# Altium PCB NSRUL.PcbDoc
Units mm, origin at the board's own origin, x right, y up, seen from the top; angles counter-clockwise.
Board outline 100 x 100 mm, 2 copper layers (Top Layer, Bottom Layer); 2 components, 0 nets, 0 pads, 36 vias.
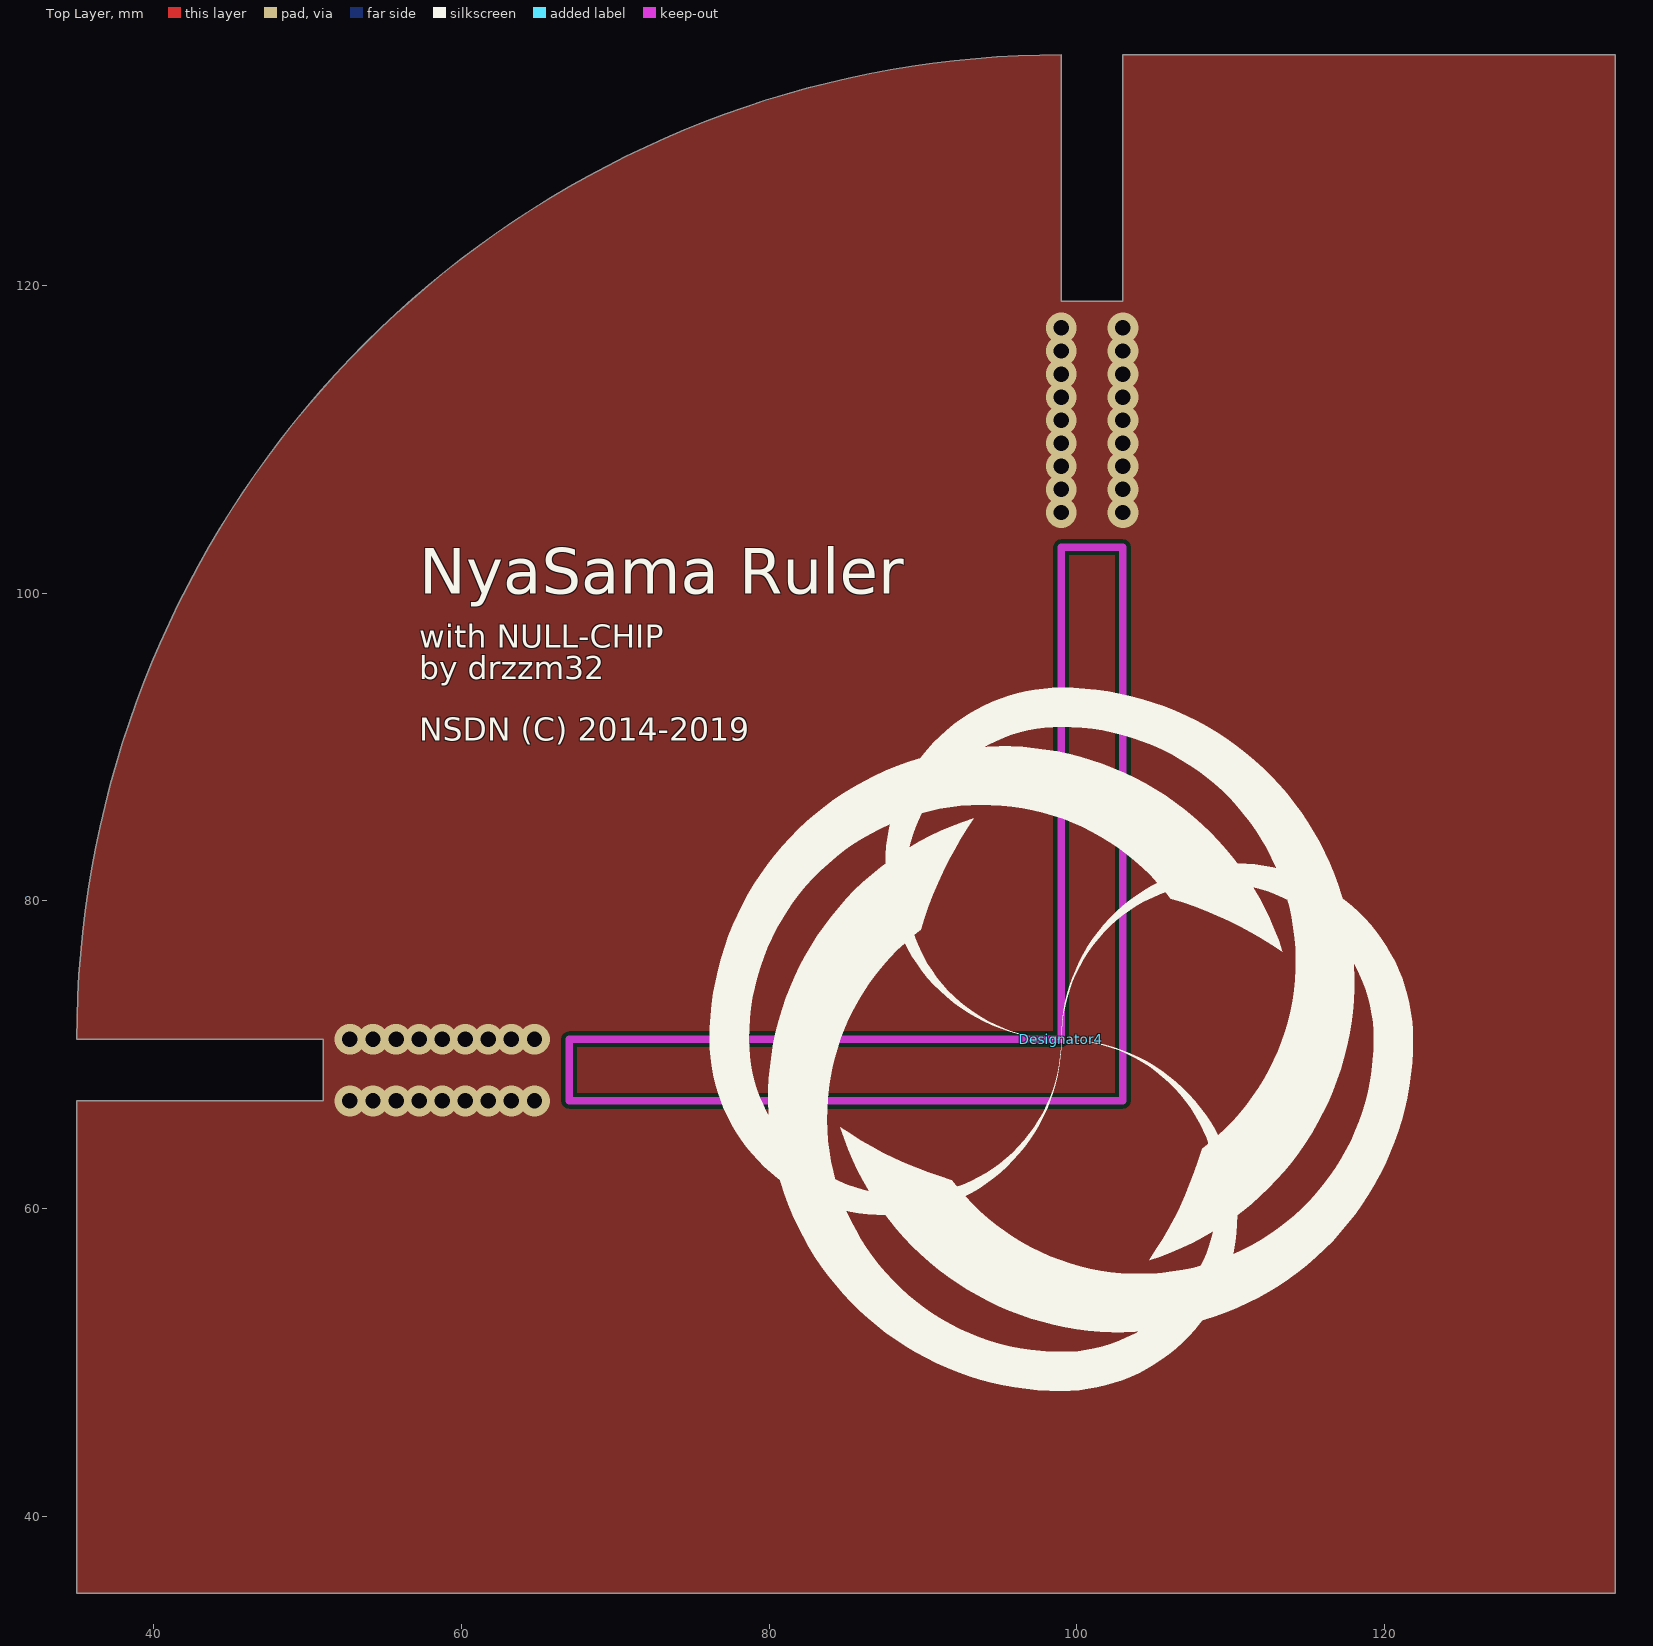
[diagram p0: Top Layer view]
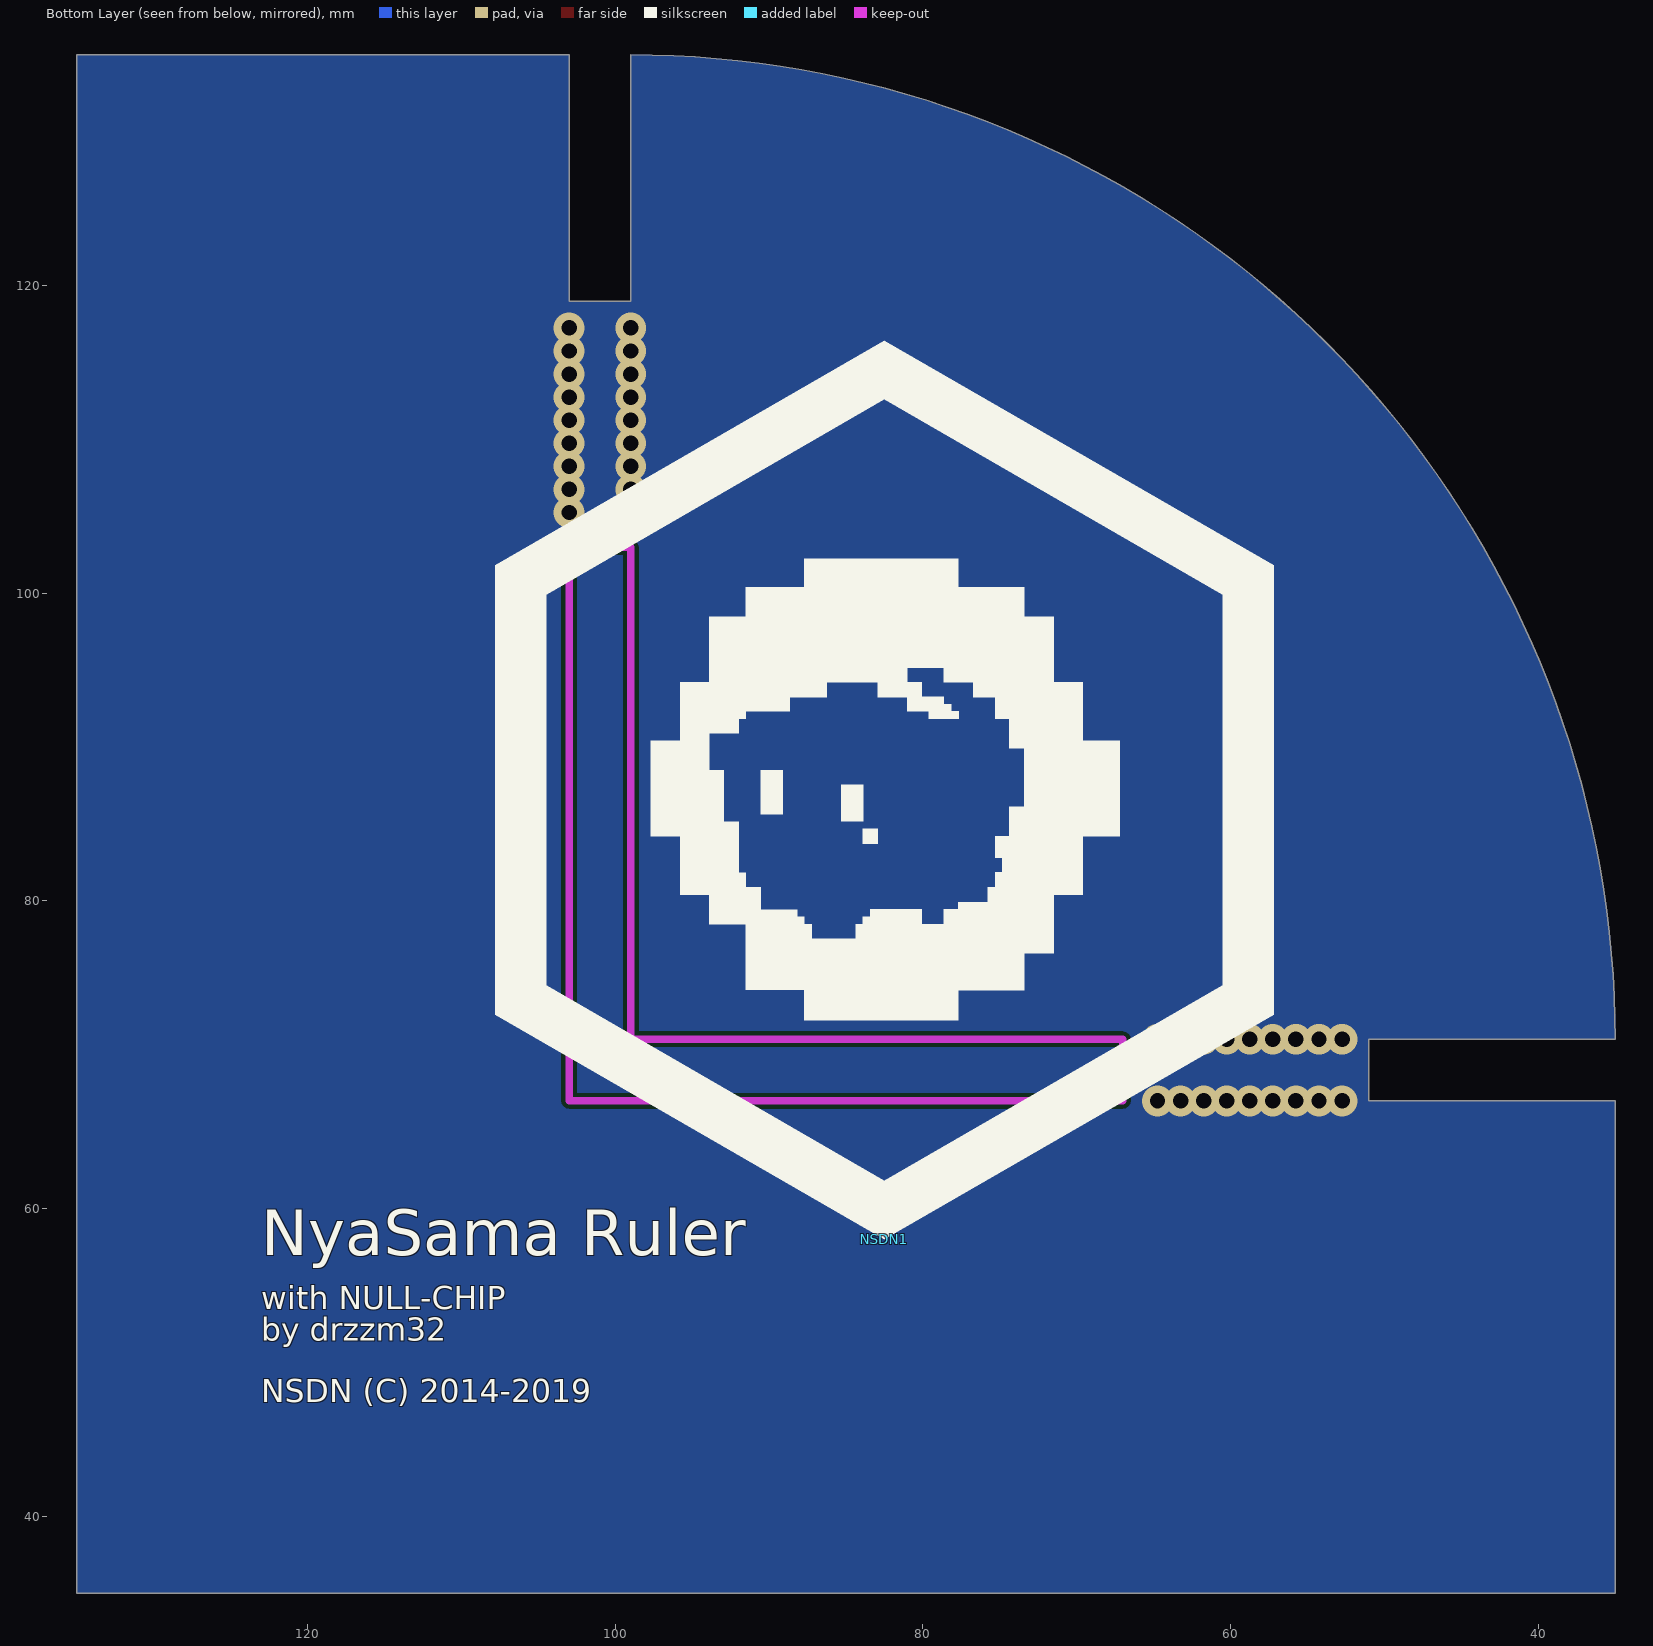
[diagram p1: Bottom Layer view, seen from below]

## Layer stack, top to bottom
Top Solder: solder mask 0.0102, Solder Resist, Dk 3.5
Top Layer: signal copper 0.0356
Dielectric 1: dielectric 0.32, FR-4, Dk 4.8
Bottom Layer: signal copper 0.0356
Bottom Solder: solder mask 0.0102, Solder Resist, Dk 3.5

## Board outline
35,67 51,67 51,71 35,71 cw(c99,71) 99,135 99,119 103,119 103,135 135,135 135,35 35,35

## Design rules (kind name [scope] priority, off if disabled: settings)
Clearance [All] p1: gap=0.254 ignorepadtopadclearanceinfootprint=FALSE except(0: Arc-Hole Track-Hole SMDPad-Hole THPad-Hole Via-Hole Fill-Hole Poly-Hole Region-Hole Text-Hole)
PolygonConnect [All] p1: connectstyle=Relief reliefconductorwidth=0.254 reliefentries=4 polygonreliefangle="90 Angle" airgapwidth=0.254
RoutingVias [All] p1: holewidth=0.711 width=1.27 viastyle="Through Hole" minholewidth=0.711 minwidth=1.27 maxholewidth=0.711 maxwidth=1.27
SolderMaskExpansion [All] p1: expansion=0.102
Width [All] p1: maxlimit=0.254 minlimit=0.254 preferedwidth=0.254
30 further rules are at their usual default settings.

## Components (designator, comment, footprint, x,y, rotation, side; value= is the part's Value field where it differs from the comment)
Designator4 "Comment" NST_4_CORE_45mm 99,71 r0 top
NSDN1 "Comment" NSDN 82.5,58 r180 bottom

## Footprints (in the part's own frame and the unit in brackets; to place one, negate y for a bottom-side part, rotate by r counter-clockwise, add the part's x,y. Pads: shape width x height; smd on the part's side, far side on the other; paste and mask are expansions set on the pad)
NSDN [mm]
  silkscreen extent -25.3,0 25.3,58.42
NST_4_CORE_45mm [mm]
  silkscreen extent -22.86,-22.86 22.86,22.86

## Via types
v1: diameter 2, hole 1, Top Layer to Bottom Layer, tented both sides, 36 vias

## Nets (pads, with @x,y where several pads share a name; then routed paths per layer and width w, separated by ;. In a path a pad name is that pad's centre, name@x,y a point inside that pad or via, vN(x,y) a via of type N, cw(c..) or ccw(c..) an arc to the next point about the centre after c; other vN are vias at no path point)
copper on no net:
  other v1: 52.75,67 54.25,67 55.75,67 57.25,67 58.75,67 60.25,67 61.75,67 63.25,67 64.75,67 52.75,71 54.25,71 55.75,71 57.25,71 58.75,71 60.25,71 61.75,71 63.25,71 64.75,71 99,105.25 103,105.25 99,106.75 103,106.75 99,108.25 103,108.25 99,109.75 103,109.75 99,111.25 103,111.25 99,112.75 103,112.75 99,114.25 103,114.25 99,115.75 103,115.75 99,117.25 103,117.25

## Polygon pours and split planes (outlines as drawn)
no net on Top Layer "Top Layer-No Net" (solid, pour order 0): 35,67 51,67 51,71 35,71 cw(c99,71) 99,135 99,119 103,119 103,135 135,135 135,35 35,35
no net on Bottom Layer "Bottom Layer-No Net1" (solid, pour order 1): 35,67 51,67 51,71 35,71 cw(c99,71) 99,135 99,119 103,119 103,135 135,135 135,35 35,35

## Keep-outs
Keep-Out Layer:
  lines w0.5: 67,67 67,71 99,71 99,103 103,103 103,67 67,67

## Silkscreen, mask and mechanical layers (free items; w line width, h text height)
Top Overlay:
  text "NyaSama Ruler" at 57.25,99 h5.08
  text "with NULL-CHIP" at 57.25,95.973 h2.54
  text "by drzzm32" at 57.25,93.918 h2.54
  text "NSDN (C) 2014-2019" at 57.25,89.918 h2.54
Bottom Overlay:
  text "NyaSama Ruler" at 123,56 h5.08
  text "with NULL-CHIP" at 123,52.973 h2.54
  text "by drzzm32" at 123,50.918 h2.54
  text "NSDN (C) 2014-2019" at 123,46.918 h2.54
Top Solder:
  drawing of 364 lines, arcs and shapes, not listed
  text "NSDN-PCB" at 57.5,83.059 h4.06
  text "0017" at 58.25,77.059 h1.52
Bottom Solder:
  drawing of 364 lines, arcs and shapes, not listed
  text "NSDN-PCB" at 59.5,53 h4.06
  text "0017" at 59,47 h1.52
Mechanical 1:
  lines w0.5: 35,35 35,67 51,67 51,71 35,71 cw(c99,71) 99,135 99,119 103,119 103,135 135,135 135,35 35,35 ; 67,67 103,67 103,103 99,103 99,71 67,71 67,67
Drill Drawing:
  text "'.Legend'" at 0,169.75 h1.52